# Altium PCB ST_LINK_V2_1.PcbDoc
Units mm, origin at the board's own origin, x right, y up, seen from the top; angles counter-clockwise.
Board outline 33 x 17 mm, 2 copper layers (Top Layer, Bottom Layer); 42 components, 29 nets, 138 pads, 20 vias.
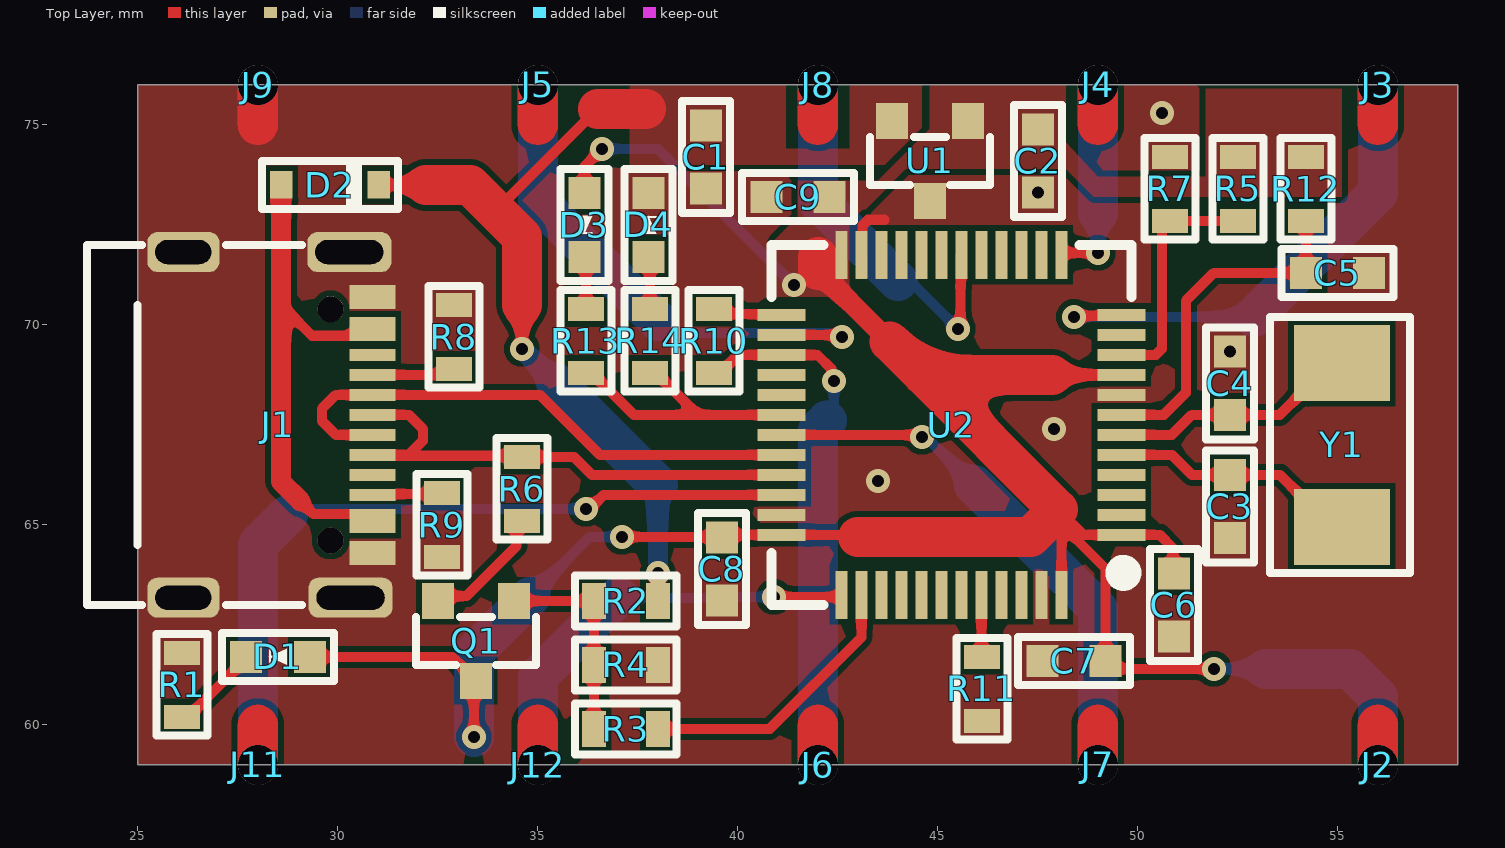
[diagram p0: Top Layer view]
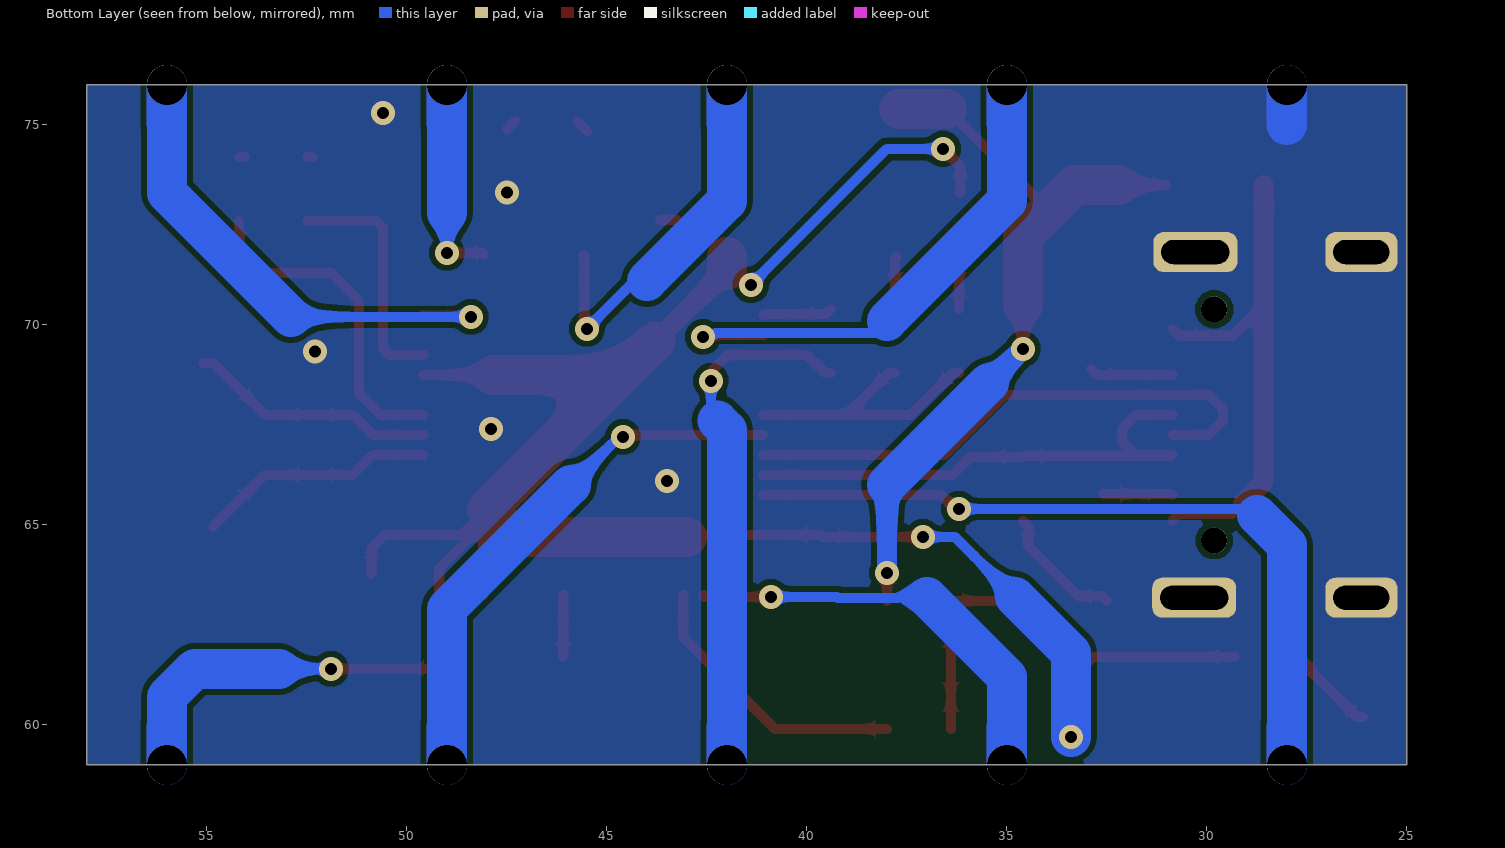
[diagram p1: Bottom Layer view, seen from below]

## Layer stack, top to bottom
Top Solder: solder mask 0.0102, Solder Resist, Dk 3.5
Top Layer: signal copper 0.0356
Dielectric 1: dielectric 0.32, FR-4, Dk 4.8
Bottom Layer: signal copper 0.0356
Bottom Solder: solder mask 0.0102, Solder Resist, Dk 3.5

## Board outline
25,59 58,59 58,76 25,76

## Design rules (kind name [scope] priority, off if disabled: settings)
Clearance [All] p1: gap=0.15 ignorepadtopadclearanceinfootprint=TRUE
PolygonConnect [All] p1: connectstyle=Direct reliefconductorwidth=0.254 reliefentries=4 polygonreliefangle="90 Angle" airgapwidth=0.254
RoutingVias [All] p1: holewidth=0.3 width=0.6 viastyle="Through Hole" minholewidth=0.2 minwidth=0.3 maxholewidth=0.3 maxwidth=0.6
SolderMaskExpansion [All] p1: expansion=0.102 istentingtop=FALSE
Width [All] p1: maxlimit=2 minlimit=0.254 preferedwidth=0.254
30 further rules are at their usual default settings.

## Components (designator, comment, footprint, x,y, rotation, side; value= is the part's Value field where it differs from the comment)
C1 "10uF" C_0603 39.2,74.2 r90 top
C2 "10uF" C_0603 47.5,74.1 r90 top
C3 "20pF" C_0603 52.3,65.46 r90 top
C4 "20pF" C_0603 52.3,68.54 r270 top
C5 "100nF" C_0603 54.99,71.3 r180 top
C6 "100nF" C_0603 50.9,63 r90 top
C7 "100nF" C_0603 48.4,61.6 r0 top
C8 "100nF" C_0603 39.6,63.9 r90 top
C9 "100nF" C_0603 41.5,73.2 r0 top
D1 "GREEN" LED_0603_G 28.5,61.7 r0 top
D2 "B5819WS-TP" SOD_323 29.8,73.5 r180 top
D3 "BLUE" LED_0603_B 36.165,72.5 r90 top
D4 "RED" LED_0603_R 37.765,72.5 r270 top
J1 "USB4105-GF-A" USB4105-GF-A 28.5,67.5 r270 top locked
J2 "CONST_PAD" CONST_PAD 56,59 r0 top
J3 "CONST_PAD" CONST_PAD 56,76 r180 top
J4 "CONST_PAD" CONST_PAD 49,76 r180 top
J5 "CONST_PAD" CONST_PAD 35,76 r180 top
J6 "CONST_PAD" CONST_PAD 42,59 r0 top
J7 "CONST_PAD" CONST_PAD 49,59 r0 top
J8 "CONST_PAD" CONST_PAD 42,76 r180 top
J9 "CONST_PAD" CONST_PAD 28,76 r180 top
J11 "CONST_PAD" CONST_PAD 28,59 r0 top
J12 "CONST_PAD" CONST_PAD 35,59 r0 top
Q1 "MMS9013L-TP" SOT_23 33.45,62.1 r180 top
R1 "220R" R_0603 26.1,61 r270 top
R2 "10k" R_0603 37.2,63.1 r0 top
R3 "100R" R_0603 37.2,59.9 r0 top
R4 "33k" R_0603 37.2,61.5 r180 top
R5 "4.7k" R_0603 52.5,73.4 r90 top
R6 "1.5k" R_0603 34.6,65.9 r270 top
R7 "4.7k" R_0603 50.8,73.4 r270 top
R8 "51k" R_0603 32.9,69.7 r90 top
R9 "51k" R_0603 32.6,65 r270 top
R10 "100R" R_0603 39.4,69.6 r270 top
R11 "100k" R_0603 46.1,60.9 r270 top
R12 "100k" R_0603 54.2,73.4 r270 top
R13 "220R" R_0603 36.2,69.6 r90 top
R14 "220R" R_0603 37.8,69.6 r270 top
U1 "ZMR330FTA" SOT_23_REG 44.8,74.1 r180 top
U2 "STM32F103C8T6" LQFP48 45.339,67.5 r180 top locked
Y1 "ECS-80-8-30Q-DS-TR" ECS-80-8-30Q-DS-TR 55.1,67 r270 top

## Footprints (in the part's own frame and the unit in brackets; to place one, negate y for a bottom-side part, rotate by r counter-clockwise, add the part's x,y. Pads: shape width x height; smd on the part's side, far side on the other; paste and mask are expansions set on the pad)
C_0603 [mm]
  rect 0.8x0.8 smd: 1(-0.79,0) 2(0.79,0)
  silkscreen extent -1.4,-0.6 1.4,0.6, body extent -0.8,-0.4 0.8,0.4, height 0.55
CONST_PAD [mm]
  round 1 hole 1: 0(0,0)
  Multi-Layer region: -0.5,0 0.5,0 0.5,1 0.45,1.217 0.312,1.391 0.111,1.487 -0.111,1.487 -0.312,1.391 -0.45,1.217 -0.5,1 -0.5,1
ECS-80-8-30Q-DS-TR [mm]
  rect 1.9x2.4 smd: 1(-2.05,0) 2(2.05,0)
  silkscreen extent -3.2,-1.8 3.2,1.7, body extent -3,-1.75 3,1.75, height 1.1
LED_0603_B [mm]
  rect 0.8x0.8 smd: 1(-0.8,0) 2(0.8,0)
  silkscreen extent -1.4,-0.6 1.4,0.6, body extent -0.8,-0.4 0.8,0.4, height 0.6
LED_0603_G [mm]
  rect 0.8x0.8 smd: 1(-0.8,0) 2(0.8,0)
  silkscreen extent -1.4,-0.6 1.4,0.6, body extent -0.8,-0.4 0.8,0.4, height 0.6
LED_0603_R [mm]
  rect 0.8x0.8 smd: 1(-0.8,0) 2(0.8,0)
  silkscreen extent -1.4,-0.6 1.4,0.6, body extent -0.8,-0.4 0.8,0.4, height 0.6
LQFP48 [mm]
  rect 1.2x0.3 smd mask+0.06: 1(-4.25,2.75) 2(-4.25,2.25) 3(-4.25,1.75) 4(-4.25,1.25) 5(-4.25,0.75) 6(-4.25,0.25) 7(-4.25,-0.25) 8(-4.25,-0.75) 9(-4.25,-1.25) 10(-4.25,-1.75) 11(-4.25,-2.25) 12(-4.25,-2.75) 25(4.25,-2.75) 26(4.25,-2.25) 27(4.25,-1.75) 28(4.25,-1.25) 29(4.25,-0.75) 30(4.25,-0.25) 31(4.25,0.25) 32(4.25,0.75) 33(4.25,1.25) 34(4.25,1.75) 35(4.25,2.25) 36(4.25,2.75)
  rect 0.3x1.2 smd mask+0.06: 13(-2.75,-4.25) 14(-2.25,-4.25) 15(-1.75,-4.25) 16(-1.25,-4.25) 17(-0.75,-4.25) 18(-0.25,-4.25) 19(0.25,-4.25) 20(0.75,-4.25) 21(1.25,-4.25) 22(1.75,-4.25) 23(2.25,-4.25) 24(2.75,-4.25) 37(2.75,4.25) 38(2.25,4.25) 39(1.75,4.25) 40(1.25,4.25) 41(0.75,4.25) 42(0.25,4.25) 43(-0.25,4.25) 44(-0.75,4.25) 45(-1.25,4.25) 46(-1.75,4.25) 47(-2.25,4.25) 48(-2.75,4.25)
  silkscreen extent -4.5,-4.5 4.5,4.5, body extent -4.5,-4.5 4.5,4.5, height 1.6
R_0603 [mm]
  rect 0.6x0.9 smd: 1(-0.8,0) 2(0.8,0)
  silkscreen extent -1.27,-0.64 1.27,0.64, body extent -0.8,-0.4 0.8,0.4, height 0.5
SOD_323 [mm]
  rect 0.56x0.69 smd mask+0.06: 1(-1.22,0) 2(1.22,0)
  silkscreen extent -1.7,-0.6 1.7,0.6, body extent -1.3,-0.67 1.3,0.67, height 1.1
SOT_23 [mm]
  rect 0.8x0.9 smd mask+0.06: 1(-0.95,-1) 2(0.95,-1) 3(0,1)
  silkscreen extent -1.5,-0.6 1.5,0.6, body extent -1.5,-1.32 1.5,1.32, height 1.08
SOT_23_REG [mm]
  rect 0.8x0.9 smd mask+0.06: 1(0,1) 2(-0.95,-1) 3(0.95,-1)
  silkscreen extent -1.5,-0.6 1.5,0.6, body extent -1.5,-1.32 1.5,1.32, height 1.08
USB4105-GF-A [mm]
  rect 0.3x1.15 smd mask+0.06: CC1(-1.25,2.363) CC2(1.75,2.362) DN1(0.25,2.363) DN2(-0.75,2.363) DP1(-0.25,2.363) DP2(0.75,2.363) SBU1(1.25,2.362) SBU2(-1.75,2.363)
  rect 0.6x1.15 smd mask+0.06: GND(-3.2,2.363) GND(3.2,2.363) VBUS(-2.4,2.363) VBUS(2.4,2.363)
  round 0.65 hole 0.65 unplated: GND(-2.89,1.318) GND(2.89,1.318)
  rrect50% 1x2.1 hole 0.6 slot 1.7 at 90 deg: SHELL_GND(-4.32,1.787) SHELL_GND(4.32,1.817)
  rrect50% 1x1.8 hole 0.6 slot 1.4 at 90 deg: SHELL_GND(-4.32,-2.362) SHELL_GND(4.32,-2.362)
  silkscreen extent -4.5,-4.78 4.5,0.6, body extent -4.47,-4.9 4.47,3, height 3.2

## Part data
C1 C2: library part C1608X5R0J106K080AB, "C Series 0603 10 uF 6.3 V ±10 % Tolerance X5R SMT Multilayer Ceramic Capacitor", Case Code (Imperial)=0603, Case Code (Metric)=1608, Dielectric=X5R, Dielectric Material=Ceramic, Manufacturer=TDK, Max Operating Temperature=85°C, Min Operating Temperature=-55°C, Package Quantity=1, Supplier Part Number 1=7882887P, Tolerance=10%, Voltage=6.3V, Capacitance=10uF, Case/Package=0603, Category="Ceramic Capacitors", ComponentLink1Description=https://datasheet.ciiva.com/23802/1796654-23802758.pdf?src-supplier=Newark, ComponentLink1URL=https://datasheet.ciiva.com/23802/1796654-23802758.pdf?src-supplier=Newark, ComponentLink2Description=https://datasheet.ciiva.com/6288/tdkmlcccaprange-6288538.pdf?src-supplier=Digi-Key, ComponentLink2URL=https://datasheet.ciiva.com/6288/tdkmlcccaprange-6288538.pdf?src-supplier=Digi-Key, ComponentLink3Description=https://datasheet.ciiva.com/28451/1796654-28451132.pdf?src-supplier=Element14, ComponentLink3URL=https://datasheet.ciiva.com/28451/1796654-28451132.pdf?src-supplier=Element14, ComponentLink4Description=https://datasheet.ciiva.com/6288/tdkmlcccaprange-6288541.pdf?src-supplier=Digi-Key, ComponentLink4URL=https://datasheet.ciiva.com/6288/tdkmlcccaprange-6288541.pdf?src-supplier=Digi-Key, ComponentLink5Description=https://datasheet.ciiva.com/16448/general-b11-16448959.pdf?src-supplier=Future+Electronics, ComponentLink5URL=https://datasheet.ciiva.com/16448/general-b11-16448959.pdf?src-supplier=Future+Electronics, ComponentLink6Description=https://datasheet.ciiva.com/22719/1796654-22719535.pdf?src-supplier=Element14, ComponentLink6URL=https://datasheet.ciiva.com/22719/1796654-22719535.pdf?src-supplier=Element14, Construction=Flat, Depth=0.8mm, Height=0.8mm, Lead Free="Lead Free", Length=1.6mm, Manufacturer Part Number=C1608X5R0J106K080AB, Mount="Surface Mount", Packaging="Tape and Reel", Pricing 1="50=0.01610, 100=0.14500, 250=0.12600, 500=0.10600 (GBP)", Radiation Hardening=No, Reach SVHC Compliant=Yes, Resistor Type=Ceramic, RoHS=Yes, RoHS Compliant=Yes, Series=C, Stock 1=5030, Supplier 1=Rs, Termination=SMD/SMT, Thickness=0.035inch, Voltage Rating=6.3V, Voltage Rating (DC)=6.3V, Weight=7.1E-05oz, Width=0.031inch
C3 C4: library part C0603C200K4HACAUTO, "Cap Cer 0603 20PF 16V Ultra Stab", Manufacturer=KEMET, Supplier Part Number 1=80-C0603C200K4HAUTO, Category="Ceramic Capacitors", Manufacturer Part Number=C0603C200K4HACAUTO, Pricing 1="1=0.18000, 10=0.08500, 50=0.08500, 100=0.04000, 1000=0.02400, 10000=0.02000 (USD)", RoHS=Yes, RoHS Compliant=Yes, Stock 1=12700, Supplier 1=Mouser
C5 C6 C7 C8 C9: library part C0603C104M4RAC7411, "Cap Ceramic 0.1uF 16V X7R 20% SMD 0603 125 Paper T/R", Case Code (Imperial)=0603, Case Code (Metric)=1608, Dielectric=X7R, Dielectric Material=Ceramic, Manufacturer=KEMET, Max Operating Temperature=125°C, Min Operating Temperature=-55°C, Package Quantity=10000, Supplier Part Number 1=80-C0603C104M4R7411, Tolerance=20%, Voltage Rating=16V, Capacitance=100nF, Case/Package=0603, Category="Ceramic Capacitors", ComponentLink1Description=http://components.arrow.com/part/dataview/3446650S8993799N7429?src-supplier=Arrow+Electronics, ComponentLink1URL=http://components.arrow.com/part/dataview/3446650S8993799N7429?src-supplier=Arrow+Electronics, ComponentLink2Description=http://www.mouser.com/ds/2/212/KEM_C1002_X7R_SMD-1102033.pdf?src-supplier=Mouser, ComponentLink2URL=http://www.mouser.com/ds/2/212/KEM_C1002_X7R_SMD-1102033.pdf?src-supplier=Mouser, ComponentLink3Description=http://www.farnell.com/datasheets/2747785.pdf?src-supplier=Farnell, ComponentLink3URL=http://www.farnell.com/datasheets/2747785.pdf?src-supplier=Farnell, ComponentLink4Description=http://www.jameco.com/Jameco/Products/ProdDS/1565046.pdf?src-supplier=Jameco, ComponentLink4URL=http://www.jameco.com/Jameco/Products/ProdDS/1565046.pdf?src-supplier=Jameco, ComponentLink5Description=http://www.farnell.com/datasheets/2747785.pdf?src-supplier=Element14, ComponentLink5URL=http://www.farnell.com/datasheets/2747785.pdf?src-supplier=Element14, ComponentLink6Description=http://www.farnell.com/datasheets/2747785.pdf?src-supplier=Newark, ComponentLink6URL=http://www.farnell.com/datasheets/2747785.pdf?src-supplier=Newark, ComponentLink7Description=https://api.kemet.com/component-edge/download/datasheet/C0603C104M4RAC7411.pdf?src-supplier=Digi-Key, ComponentLink7URL=https://api.kemet.com/component-edge/download/datasheet/C0603C104M4RAC7411.pdf?src-supplier=Digi-Key, ComponentLink8Description=http://www.kemet.com/docfinder?Partnumber=C0603C104M4RAC7411&src-supplier=Digi-Key, ComponentLink8URL=http://www.kemet.com/docfinder?Partnumber=C0603C104M4RAC7411&src-supplier=Digi-Key, ComponentLink9Description=http://capacitoredge.kemet.com/capedge2/DataSheet?pn=C0603C104M4RAC7411&src-supplier=Avnet, ComponentLink9URL=http://capacitoredge.kemet.com/capedge2/DataSheet?pn=C0603C104M4RAC7411&src-supplier=Avnet, ComponentLink10Description=https://www.verical.com/server-webapp/html/getDatasheet?partID=58458&src-supplier=Verical, ComponentLink10URL=https://www.verical.com/server-webapp/html/getDatasheet?partID=58458&src-supplier=Verical, Construction=Flat, Depth=0.8mm, Dissipation Factor=3.5%, Height=0.8mm, Lead Pitch=0.7mm, Length=1.6mm, Manufacturer Part Number=C0603C104M4RAC7411, Mount="Surface Mount", Packaging="Tape and Reel", Pricing 1="1=0.10000, 10=0.02700, 50=0.02700, 100=0.01200, 1000=0.00700, 10000=0.00500 (USD)", Radiation Hardening=No, RoHS=Yes, RoHS Compliant=Yes, Series=C, Stock 1=1220822, Supplier 1=Mouser, Termination=SMD/SMT, Thickness=0.034inch, Voltage Rating (DC)=16V, Width=0.8mm
D1: library part 150060GS75000, "Led, Green, 520 Nm, 3.2 V, 30 Ma, 430 Mcd Rohs Compliant: Yes", Case Code (Imperial)=0603, Case Code (Metric)=1608, Color=Green, Forward Current=30mA, Forward Voltage=3.2V, Lens Color=Colorless, Manufacturer="Wurth Electronics", Max Operating Temperature=85°C, Min Operating Temperature=-40°C, Package Quantity=1, Supplier Part Number 1=8154209P, Test Current=20mA, Case/Package=0603, Category=LEDs, ComponentLink1Description=https://datasheet.ciiva.com/29562/150060gs75000-29562868.pdf?src-supplier=Digi-Key, ComponentLink1URL=https://datasheet.ciiva.com/29562/150060gs75000-29562868.pdf?src-supplier=Digi-Key, ComponentLink2Description=https://datasheet.ciiva.com/29279/759427-da-01-en-chipled-0603-w-kl-gruen-150060gs75000-29279201.pdf?src-supplier=Conrad, ComponentLink2URL=https://datasheet.ciiva.com/29279/759427-da-01-en-chipled-0603-w-kl-gruen-150060gs75000-29279201.pdf?src-supplier=Conrad, ComponentLink3Description=https://datasheet.ciiva.com/29562/150060gs75000-29562869.pdf?src-supplier=Digi-Key, ComponentLink3URL=https://datasheet.ciiva.com/29562/150060gs75000-29562869.pdf?src-supplier=Digi-Key, ComponentLink4Description=https://datasheet.ciiva.com/29562/150060gs75000-29562870.pdf?src-supplier=Digi-Key, ComponentLink4URL=https://datasheet.ciiva.com/29562/150060gs75000-29562870.pdf?src-supplier=Digi-Key, Dominant Wavelength=520nm, Height=0.8mm, Lead Free="Lead Free", Length=1.6mm, Lens Size=0.7mm, Lens Style=Clear,Flat,Rectangular, Lens Transparency=Clear, Luminous Intensity=430mcd, Manufacturer Part Number=150060GS75000, Mount="Surface Mount", Packaging="Cut Tape", Pricing 1="500=0.00083, 1000=0.07900, 2000=0.07500, 4000=0.07100 (GBP)", RoHS=Yes, RoHS Compliant=Yes, Series=WL-SMCW, Stock 1=20200, Supplier 1=Rs, Viewing Angle=140°, Wavelength=520nm, Width=0.8mm
D2: "DIODE SCHOTTKY 40V 1A SOD323", Average Rectified Current=1A, Forward Voltage=900mV, Manufacturer=MCC, Max Operating Temperature=125°C, Max Reverse Leakage Current=1mA, Max Reverse Voltage (DC)=40V, Max Surge Current=10A, Min Operating Temperature=-65°C, Package Quantity=1, Supplier Part Number 1=6054560, Category="Rectifier Diodes", ComponentLink1Description=https://datasheet.ciiva.com/4715/b5817ws-b5819wssod-323-48861-4715941.pdf?src-supplier=Mouser, ComponentLink1URL=https://datasheet.ciiva.com/4715/b5817ws-b5819wssod-323-48861-4715941.pdf?src-supplier=Mouser, ComponentLink2Description=https://datasheet.ciiva.com/15200/getdatasheetpartid-184930-15200423.pdf?src-supplier=Verical, ComponentLink2URL=https://datasheet.ciiva.com/15200/getdatasheetpartid-184930-15200423.pdf?src-supplier=Verical, ComponentLink3Description=https://datasheet.ciiva.com/912/b5817ws-b5819wssod-323-912736.pdf?src-supplier=Digi-Key, ComponentLink3URL=https://datasheet.ciiva.com/912/b5817ws-b5819wssod-323-912736.pdf?src-supplier=Digi-Key, ComponentLink4Description=https://datasheet.ciiva.com/912/b5817ws-b5819wssod-323-912737.pdf?src-supplier=Digi-Key, ComponentLink4URL=https://datasheet.ciiva.com/912/b5817ws-b5819wssod-323-912737.pdf?src-supplier=Digi-Key, ComponentLink5Description=https://datasheet.ciiva.com/912/b5817ws-b5819wssod-323-912735.pdf?src-supplier=Digi-Key, ComponentLink5URL=https://datasheet.ciiva.com/912/b5817ws-b5819wssod-323-912735.pdf?src-supplier=Digi-Key, Element Configuration=Single, Lead Free="Lead Free", Manufacturer Part Number=B5819WS-TP, Mount="Surface Mount", Number of Pins=2, Packaging="Tape and Reel", Peak Non-Repetitive Surge Current=10A, Pricing 1="3000=0.05800, 9000=0.05580, 15000=0.05480, 45000=0.05280, 75000=0.05100 (USD)", Radiation Hardening=No, RoHS=Yes, RoHS Compliant=Yes, Series=-, Stock 1=168000, Supplier 1="Future Electronics"
D3: library part 150060BS75003, "SMT Mono-color Chip Led Watercle", Manufacturer="Wurth Electronics", Supplier Part Number 1=2407008P, Category=LEDs, Manufacturer Part Number=150060BS75003, Pricing 1="50=0.00824, 100=0.18100, 500=0.16500, 2000=0.13200 (GBP)", RoHS=No, Stock 1=11175, Supplier 1=Rs
D4: library part 150060RS75000, "LED Low-Power Uni-Color Red 630nm 2V 2-Pin Chip 0603(1608Metric) T/R", Case Code (Imperial)=0603, Case Code (Metric)=1608, Color=Red, Forward Current=30mA, Forward Voltage=2V, Lens Color=Colorless, Manufacturer="Wurth Electronics", Max Operating Temperature=85°C, Min Operating Temperature=-40°C, Package Quantity=1, Supplier Part Number 1=8154203P, Test Current=20mA, Case/Package=0603, Category=LEDs, ComponentLink1Description=https://datasheet.ciiva.com/29563/150060rs75000-29563040.pdf?src-supplier=Digi-Key, ComponentLink1URL=https://datasheet.ciiva.com/29563/150060rs75000-29563040.pdf?src-supplier=Digi-Key, ComponentLink2Description=https://datasheet.ciiva.com/29279/759428-da-01-en-chipled-0603-w-kl-rot-150060rs75000-29279196.pdf?src-supplier=Conrad, ComponentLink2URL=https://datasheet.ciiva.com/29279/759428-da-01-en-chipled-0603-w-kl-rot-150060rs75000-29279196.pdf?src-supplier=Conrad, Dominant Wavelength=625nm, Height=0.8mm, Length=1.6mm, Lens Size=0.7mm, Lens Style=Clear,Flat,Rectangular, Lens Transparency=Clear, Luminous Intensity=250mcd, Manufacturer Part Number=150060RS75000, Mount="Surface Mount", Packaging="Cut Tape", Pricing 1="500=0.00083, 1000=0.07900, 2000=0.07500, 4000=0.07200 (GBP)", RoHS=Yes, RoHS Compliant=Yes, Series=WL-SMCW, Stock 1=8900, Supplier 1=Rs, Viewing Angle=140°, Wavelength=625nm, Width=0.8mm
J1: "Conn USB 2.0 Type C RCP 24 POS 0.3mm/0.5mm Solder RA SMD 24 Terminal 1 Port T/R", Flammability Rating="UL94 V-0", Insulation Color=Black, Manufacturer="Global Connector Technology", Max Operating Temperature=85°C, Min Operating Temperature=-40°C, Supplier Part Number 1=3158113, Category="USB Connectors", ComponentLink1Description=https://gct.co/files/drawings/usb4105.pdf?src-supplier=Digi-Key, ComponentLink1URL=https://gct.co/files/drawings/usb4105.pdf?src-supplier=Digi-Key, Connector Type=USB, Contact Plating=Gold, Gender=Receptacle, Manufacturer Part Number=USB4105-GF-A, Mating Cycles=10000, Mount="Surface Mount,Through Hole,Horizontal", Number of Ports=1, Pricing 1="800=0.45000, 1600=0.44000, 2400=0.43500, 3200=0.43000, 4000=0.42000 (USD)", RoHS=No, Series=USB4105, Shielding=Shielded, Stock 1=800, Supplier 1="Future Electronics", Termination=Solder
Q1: "Trans Gp Bjt NPN 25V 0.5A 3-PIN SOT-23 T/r", Case/Package=SOT-23, Collector Base Voltage (VCBO)=40V, Collector Emitter Voltage (VCEO)=25V, Emitter Base Voltage (VEBO)=5V, Frequency=150MHz, Manufacturer=MCC, Max Operating Temperature=150°C, Min Operating Temperature=-55°C, Power Dissipation=300mW, Supplier Part Number 1=833-MMS9013L-TP, Category=BJTs, ComponentLink1Description=http://components.arrow.com/part/dataview/51062823S110403N2022?src-supplier=Arrow+Electronics, ComponentLink1URL=http://components.arrow.com/part/dataview/51062823S110403N2022?src-supplier=Arrow+Electronics, Manufacturer Part Number=MMS9013L-TP, Mount="Surface Mount", Number of Elements=1, Number of Pins=3, Packaging="Tape and Reel", Polarity=NPN, Pricing 1="1=0.28000, 10=0.22800, 50=0.22800, 100=0.12100, 1000=0.05500, 10000=0.03600 (USD)", RoHS=Yes, Stock 1=2960, Supplier 1=Mouser
R1 R13 R14: library part RC0603FR-07220RL, "Res Thick Film 0603 220 Ohm 1% 0.1W(1/10W) ±100ppm/°C Pad SMD T/R", Case Code (Imperial)=0603, Case Code (Metric)=1608, Manufacturer=Yageo, Max Operating Temperature=155°C, Max Power Dissipation=100mW, Min Operating Temperature=-55°C, Package Quantity=1, Resistance Tolerance=1%, Resistor Type="Thick Film", Supplier Part Number 1=9705021, Temperature Coefficient=100ppm/°C, Voltage Rating=50V, Case/Package=0603, Category="Chip SMD Resistors", ComponentLink1Description=https://datasheet.ciiva.com/2453/pyu-r-int-thick-7-2453974.pdf?src-supplier=Digi-Key, ComponentLink1URL=https://datasheet.ciiva.com/2453/pyu-r-int-thick-7-2453974.pdf?src-supplier=Digi-Key, ComponentLink2Description=https://datasheet.ciiva.com/2453/pyu-r-int-thick-7-2453975.pdf?src-supplier=Digi-Key, ComponentLink2URL=https://datasheet.ciiva.com/2453/pyu-r-int-thick-7-2453975.pdf?src-supplier=Digi-Key, ComponentLink3Description=https://datasheet.ciiva.com/2453/pyu-r-int-thick-7-2453973.pdf?src-supplier=Digi-Key, ComponentLink3URL=https://datasheet.ciiva.com/2453/pyu-r-int-thick-7-2453973.pdf?src-supplier=Digi-Key, ComponentLink4Description=https://datasheet.ciiva.com/7746/1738695-7746301.pdf?src-supplier=Element14, ComponentLink4URL=https://datasheet.ciiva.com/7746/1738695-7746301.pdf?src-supplier=Element14, ComponentLink5Description=https://datasheet.ciiva.com/7746/1738695-7746300.pdf?src-supplier=Element14, ComponentLink5URL=https://datasheet.ciiva.com/7746/1738695-7746300.pdf?src-supplier=Element14, Construction=Rectangular, Depth=0.8mm, Features="Moisture Resistant", Height=0.022inch, Lead Free="Lead Free", Length=0.063inch, Manufacturer Part Number=RC0603FR-07220RL, Military Standard=Not, Number of Pins=2, Number of Terminations=2, Packaging="Tape and Reel", Power Rating=100mW, Pricing 1="5000=0.00140, 50000=0.00130, 200000=0.00130, 625000=0.00120, 2000000=0.00110 (USD)", Reach SVHC Compliant=Yes, Resistance=220R, RoHS=Yes, RoHS Compliant=Yes, Series=RC, Size Code=0603, Stock 1=2420000, Supplier 1="Future Electronics", Termination=SMD/SMT, Tolerance=1%, Voltage Rating (DC)=50V, Width=0.031inch
R2: library part RC0603FR-0710KL, "RES SMD 10K OHM 1% 1/10W 0603", Case Code (Imperial)=0603, Case Code (Metric)=1608, Manufacturer=Yageo, Max Operating Temperature=155°C, Max Power Dissipation=100mW, Min Operating Temperature=-55°C, Resistance=10kR, Resistance Tolerance=1%, Resistor Type="Thick Film", Supplier Part Number 1=3349388, Temperature Coefficient=100ppm/°C, Voltage Rating=75V, Voltage Rating (DC)=50V, Case/Package=0603, Category="Chip SMD Resistors", ComponentLink1Description=https://datasheet.ciiva.com/7660/38590-7660789.pdf?src-supplier=Element14, ComponentLink1URL=https://datasheet.ciiva.com/7660/38590-7660789.pdf?src-supplier=Element14, ComponentLink2Description=https://datasheet.ciiva.com/7983/443971-7983596.pdf?src-supplier=Element14, ComponentLink2URL=https://datasheet.ciiva.com/7983/443971-7983596.pdf?src-supplier=Element14, ComponentLink3Description=https://datasheet.ciiva.com/22747/443971-22747519.pdf?src-supplier=Element14, ComponentLink3URL=https://datasheet.ciiva.com/22747/443971-22747519.pdf?src-supplier=Element14, ComponentLink4Description=https://datasheet.ciiva.com/46440/1868787-46440891.pdf?src-supplier=Element14, ComponentLink4URL=https://datasheet.ciiva.com/46440/1868787-46440891.pdf?src-supplier=Element14, ComponentLink5Description=https://datasheet.ciiva.com/7746/1738695-7746239.pdf?src-supplier=Element14, ComponentLink5URL=https://datasheet.ciiva.com/7746/1738695-7746239.pdf?src-supplier=Element14, Construction=Rectangular, Depth=0.8mm, Features="Moisture Resistant", Height=0.45mm, Lead Free="Lead Free", Lead Pitch=0.3mm, Length=1.6mm, Manufacturer Part Number=RC0603FR-0710KL, Military Standard=Not, Number of Pins=2, Number of Terminations=2, Packaging="Tape and Reel", Power Rating=100mW, Pricing 1="1=0.10000, 20=0.06640, 100=0.04840, 500=0.03040, 2500=0.01240 (USD)", Reach SVHC Compliant=Yes, RoHS=Yes, RoHS Compliant=Yes, Series=RC, Size Code=0603, Stock 1=252929, Supplier 1="Future Electronics", Termination=SMD/SMT, Tolerance=1%, Weight=7.1E-05oz, Width=0.8mm
R3 R10: library part AR0603FR-07100RL, "Res Thick Film 0603 100 Ohm 1% 1/10W ±100ppm/°C Molded SMD SMD Paper T/R", Case/Package=0603, Manufacturer=Yageo, Max Operating Temperature=155°C, Max Power Dissipation=100mW, Min Operating Temperature=-55°C, Resistor Type="Thick Film", Supplier Part Number 1=603-AR0603FR-07100RL, Temperature Coefficient=100ppm/°C, Tolerance=1%, Category="Chip SMD Resistors", ComponentLink1Description=https://datasheet.ciiva.com/8887/pyu-ar-51-rohs-l-7-8887862.pdf?src-supplier=Avnet, ComponentLink1URL=https://datasheet.ciiva.com/8887/pyu-ar-51-rohs-l-7-8887862.pdf?src-supplier=Avnet, Contact Plating=Gold, Features="Moisture Resistant", Height=0.022inch, Length=0.063inch, Manufacturer Part Number=AR0603FR-07100RL, Number of Terminations=2, Packaging="Tape and Reel", Pricing 1="1=0.44000, 10=0.33800, 50=0.33800, 100=0.14200, 1000=0.07900, 10000=0.06400 (USD)", Radiation Hardening=No, Resistance=100R, RoHS=Yes, RoHS Compliant=Yes, Series=AR, Stock 1=2721, Supplier 1=Mouser, Width=0.032inch
R4: library part RC0603FR-0733KL, "Res Thick Film 0603 33K Ohm 1% 0.1W(1/10W) ±100ppm/C Pad SMD T/R", Case Code (Imperial)=0603, Case Code (Metric)=1608, Manufacturer=Yageo, Max Operating Temperature=155°C, Max Power Dissipation=100mW, Min Operating Temperature=-55°C, Package Quantity=1, Resistance=33kR, Resistance Tolerance=1%, Resistor Type="Thick Film", Supplier Part Number 1=9831728, Temperature Coefficient=100ppm/°C, Voltage Rating=50V, Case/Package=0603, Category="Chip SMD Resistors", ComponentLink1Description=https://datasheet.ciiva.com/46395/443971-46395005.pdf?src-supplier=Element14, ComponentLink1URL=https://datasheet.ciiva.com/46395/443971-46395005.pdf?src-supplier=Element14, ComponentLink2Description=https://datasheet.ciiva.com/2454/pyu-r-int-thick-7-2454010.pdf?src-supplier=Digi-Key, ComponentLink2URL=https://datasheet.ciiva.com/2454/pyu-r-int-thick-7-2454010.pdf?src-supplier=Digi-Key, ComponentLink3Description=https://datasheet.ciiva.com/2454/pyu-r-int-thick-7-2454011.pdf?src-supplier=Digi-Key, ComponentLink3URL=https://datasheet.ciiva.com/2454/pyu-r-int-thick-7-2454011.pdf?src-supplier=Digi-Key, ComponentLink4Description=https://datasheet.ciiva.com/2454/pyu-r-int-thick-7-2454009.pdf?src-supplier=Digi-Key, ComponentLink4URL=https://datasheet.ciiva.com/2454/pyu-r-int-thick-7-2454009.pdf?src-supplier=Digi-Key, ComponentLink5Description=https://datasheet.ciiva.com/7746/443971-7746332.pdf?src-supplier=Element14, ComponentLink5URL=https://datasheet.ciiva.com/7746/443971-7746332.pdf?src-supplier=Element14, ComponentLink6Description=https://datasheet.ciiva.com/7746/443971-7746333.pdf?src-supplier=Element14, ComponentLink6URL=https://datasheet.ciiva.com/7746/443971-7746333.pdf?src-supplier=Element14, ComponentLink7Description=https://datasheet.ciiva.com/15189/getdatasheetpartid-353493-15189706.pdf?src-supplier=Verical, ComponentLink7URL=https://datasheet.ciiva.com/15189/getdatasheetpartid-353493-15189706.pdf?src-supplier=Verical, Construction=Rectangular, Depth=0.8mm, Features="Moisture Resistant", Height=0.022inch, Lead Free="Lead Free", Length=0.063inch, Manufacturer Part Number=RC0603FR-0733KL, Military Standard=Not, Number of Pins=2, Number of Terminations=2, Packaging="Tape and Reel", Power Rating=100mW, Pricing 1="5000=0.00140, 50000=0.00130, 200000=0.00130, 625000=0.00120, 2000000=0.00110 (USD)", Reach SVHC Compliant=Yes, RoHS=Yes, RoHS Compliant=Yes, Series=RC, Size Code=0603, Stock 1=3300000, Supplier 1="Future Electronics", Termination=SMD/SMT, Tolerance=1%, Voltage Rating (DC)=50V, Width=0.031inch
R5 R7: library part 1622960-1, "Res Thick Film 0603 4.7K Ohm 1% 0.1W(1/10W) ±100ppm/C Pad SMD T/R", Manufacturer="TE Connectivity", Supplier Part Number 1=46AK9345, Category=Uncategorized, ComponentLink1Description=https://datasheet.ciiva.com/6538/eng-cd-1622282-ba-6538072.pdf?src-supplier=Digi-Key, ComponentLink1URL=https://datasheet.ciiva.com/6538/eng-cd-1622282-ba-6538072.pdf?src-supplier=Digi-Key, ComponentLink2Description=https://datasheet.ciiva.com/8912/eng-ds-1773204-f-8912646.pdf?src-supplier=Avnet, ComponentLink2URL=https://datasheet.ciiva.com/8912/eng-ds-1773204-f-8912646.pdf?src-supplier=Avnet, Manufacturer Part Number=1622960-1, Pricing 1="1=0.004000, 25=0.004000, 100=0.004000, 250=0.004000, 500=0.004000, 1000=0.004000 (USD)", RoHS=Yes, Stock 1=19907, Supplier 1=Newark
R6: library part RC0603FR-071K5L, "Res General Purpose Thick Film 0603 1.5K Ohm 1% 1/10W ±100ppm/°C Molded SMD Paper T/R", Case Code (Imperial)=0603, Case Code (Metric)=1608, Manufacturer=Yageo, Max Operating Temperature=155°C, Max Power Dissipation=100mW, Min Operating Temperature=-55°C, Package Quantity=1, Resistance=1.5kR, Resistance Tolerance=1%, Resistor Type="Thick Film", Supplier Part Number 1=5194295, Temperature Coefficient=100ppm/°C, Voltage Rating=50V, Case/Package=0603, Category="Chip SMD Resistors", Construction=Rectangular, Depth=0.8mm, Features="Moisture Resistant", Height=0.022inch, Lead Free="Lead Free", Length=0.063inch, Manufacturer Part Number=RC0603FR-071K5L, Military Standard=Not, Number of Pins=2, Number of Terminations=2, Packaging="Tape and Reel", Power Rating=100mW, Pricing 1="5000=0.00150, 50000=0.00140, 100000=0.00140, 200000=0.00140, 375000=0.00140, 625000=0.00130, 1250000=0.00130, 2000000=0.00120, 5000000=0.00120 (USD)", Reach SVHC Compliant=Yes, RoHS=Yes, RoHS Compliant=Yes, Series=RC, Size Code=0603, Stock 1=16310000, Supplier 1="Future Electronics", Termination=SMD/SMT, Tolerance=1%, Voltage Rating (DC)=50V, Width=0.031inch
R8 R9: library part AF0603FR-0751KL, "Res Thick Film 0603 51K Ohm 1% 1/10W ±100ppm/°C Molded SMD Paper T/R", Case/Package=0603, Manufacturer=Yageo, Max Operating Temperature=155°C, Max Power Dissipation=100mW, Min Operating Temperature=-55°C, Resistance=51kR, Resistor Type="Thick Film", Supplier Part Number 1=603-AF0603FR-0751KL, Temperature Coefficient=100ppm/°C, Tolerance=1%, Category="Chip SMD Resistors", ComponentLink1Description=http://www.yageo.com/documents/recent/PYu-AF_51_RoHS_L_5.pdf?src-supplier=Digi-Key, ComponentLink1URL=http://www.yageo.com/documents/recent/PYu-AF_51_RoHS_L_5.pdf?src-supplier=Digi-Key, Features="Moisture Resistant,Anti-Sulfur", Height=0.022inch, Length=0.063inch, Manufacturer Part Number=AF0603FR-0751KL, Number of Terminations=2, Packaging="Tape and Reel", Pricing 1="1=0.19000, 10=0.06300, 50=0.06300, 100=0.02600, 1000=0.01200, 10000=0.00800 (USD)", RoHS=Yes, RoHS Compliant=Yes, Stock 1=893, Supplier 1=Mouser, Width=0.031inch
R11 R12: library part RC0603FR-07100KL, "RES SMD 100K OHM 1% 1/10W 0603", Case Code (Imperial)=0603, Case Code (Metric)=1608, Manufacturer=Yageo, Max Operating Temperature=155°C, Max Power Dissipation=100mW, Min Operating Temperature=-55°C, Resistance=100kR, Resistance Tolerance=1%, Resistor Type="Thick Film", Supplier Part Number 1=3697448, Temperature Coefficient=100ppm/°C, Voltage Rating=50V, Working Voltage=75V, Case/Package=0603, Category="Chip SMD Resistors", Construction=Rectangular, Depth=0.8mm, Features="Moisture Resistant", Height=0.45mm, Lead Free="Lead Free", Length=1.6mm, Manufacturer Part Number=RC0603FR-07100KL, Military Standard=Not, Number of Pins=2, Number of Terminations=2, Packaging="Tape and Reel", Power Rating=100mW, Pricing 1="5000=0.00140, 50000=0.00130, 200000=0.00130, 625000=0.00120, 2000000=0.00110 (USD)", Reach SVHC Compliant=Yes, RoHS=Yes, RoHS Compliant=Yes, Series=RC, Stock 1=32435000, Supplier 1="Future Electronics", Technology="THICK FILM", Termination=SMD/SMT, Tolerance=1%, Voltage Rating (DC)=50V, Width=0.8mm
U1: "ZMR330 Series 3.3 V 50 mA Fixed Output SMT Miniature Voltage Regulator - SOT-23", Case/Package=SOT-23, Manufacturer="Diodes Zetex", Max Input Voltage=24V, Max Operating Temperature=125°C, Max Output Current=50mA, Max Power Dissipation=500mW, Min Input Voltage=4.8V, Min Operating Temperature=-55°C, Min Output Voltage=3.3V, Package Quantity=3000, Power Supply Rejection Ratio (PSRR)=55dB, Supplier Part Number 1=7106313P, Category="Voltage Regulators - Linear", ComponentLink1Description=https://datasheet.ciiva.com/2040/zmrseries-2040368.pdf?src-supplier=Digi-Key, ComponentLink1URL=https://datasheet.ciiva.com/2040/zmrseries-2040368.pdf?src-supplier=Digi-Key, ComponentLink2Description=https://datasheet.ciiva.com/8240/zmrseries-8240837.pdf?src-supplier=Avnet, ComponentLink2URL=https://datasheet.ciiva.com/8240/zmrseries-8240837.pdf?src-supplier=Avnet, ComponentLink3Description=https://datasheet.ciiva.com/16509/zmrseries-16509194.pdf?src-supplier=Future+Electronics, ComponentLink3URL=https://datasheet.ciiva.com/16509/zmrseries-16509194.pdf?src-supplier=Future+Electronics, Height=1.02mm, Lead Free="Lead Free", Length=3.04mm, Manufacturer Part Number=ZMR330FTA, Mount="Surface Mount", Number of Outputs=1, Number of Pins=3, Number of Regulators=1, Output Current=50mA, Output Type=Fixed, Output Voltage=3.3V, Packaging="Tape and Reel", Polarity=Positive, Power Dissipation=500mW, Power Rating=500mW, Pricing 1="30=0.15480, 150=0.66200, 750=0.55400, 1500=0.43800 (GBP)", Radiation Hardening=No, Reach SVHC Compliant=Yes, RoHS=Yes, RoHS Compliant=Yes, Series=-, Stock 1=4550, Supplier 1=Rs, Weight=0.000282oz, Width=1.4mm
U2: "IC MCU 32BIT 64KB FLASH 48LQFP", Case/Package=LQFP, Frequency=72MHz, Manufacturer=STMicroelectronics, Max Operating Temperature=85°C, Max Power Dissipation=363mW, Max Supply Voltage=3.6V, Min Operating Temperature=-40°C, Min Supply Voltage=2V, Package Quantity=1500, Supplier Part Number 1=511-STM32F103C8T6, Address Bus Width=32b, Category=Microcontrollers, ComponentLink1Description=https://datasheet.ciiva.com/15122/getdatasheetpartid-69880-15122076.pdf?src-supplier=Verical, ComponentLink1URL=https://datasheet.ciiva.com/15122/getdatasheetpartid-69880-15122076.pdf?src-supplier=Verical, ComponentLink2Description=https://datasheet.ciiva.com/8054/1730126-8054942.pdf?src-supplier=Element14, ComponentLink2URL=https://datasheet.ciiva.com/8054/1730126-8054942.pdf?src-supplier=Element14, ComponentLink3Description=https://datasheet.ciiva.com/14100/pustm-arm-microcont-stm32f103-en-14100508.pdf?src-supplier=Distrelec, ComponentLink3URL=https://datasheet.ciiva.com/14100/pustm-arm-microcont-stm32f103-en-14100508.pdf?src-supplier=Distrelec, ComponentLink4Description=https://datasheet.ciiva.com/16210/cd00161566-16210248.pdf?src-supplier=Future+Electronics, ComponentLink4URL=https://datasheet.ciiva.com/16210/cd00161566-16210248.pdf?src-supplier=Future+Electronics, ComponentLink5Description=https://datasheet.ciiva.com/48687/001075658-da-01-en-mcu-64kb-mem-stm32f103c8t6-lqfp-48-stm-48687589.pdf?src-supplier=Conrad, ComponentLink5URL=https://datasheet.ciiva.com/48687/001075658-da-01-en-mcu-64kb-mem-stm32f103c8t6-lqfp-48-stm-48687589.pdf?src-supplier=Conrad, Core Architecture=ARM, Data Bus Width=32b, Density=64KB, Height=1.4mm, Interface=I2C,SPI,USB,CAN,USART, Lead Free="Lead Free", Length=7mm, Manufacturer Part Number=STM32F103C8T6, Max Frequency=72MHz, Memory Size=64KB, Memory Type=FLASH, Number of ADC Channels=10, Number of Bits=32, Number of I2C Channels=2, Number of I/Os=37, Number of Pins=48, Number of Programmable I/O=48, Number of PWM Channels=1, Number of SPI Channels=2, Number of Timers/Counters=3, Oscillator Type=Internal, Packaging=Tray, Peripherals="POR,PWM,WDT,DMA,Temp Sensor,I2C", Pricing 1="1=6.66000, 10=6.02000, 50=4.98000, 100=4.98000, 1000=3.75000, 10000=3.67000 (USD)", Radiation Hardening=No, RAM Size=20KB, Reach SVHC Compliant=Yes, RoHS=Yes, RoHS Compliant=Yes, Series=STM32F103C8, Stock 1=33571, Supplier 1=Mouser, Termination=SMD/SMT, Watchdog Timer=Yes, Weight=0.006349oz, Width=7mm
Y1: "Crystal 8.000 Mhz 8PF SMD", Manufacturer="ECS International", Supplier Part Number 1=520-80-8-30Q-DS-TR, Category=Uncategorized, Manufacturer Part Number=ECS-80-8-30Q-DS-TR, Pricing 1="1=0.84000, 10=0.73600, 50=0.73600, 100=0.60800, 1000=0.47900, 10000=0.43100 (USD)", RoHS=Yes, RoHS Compliant=Yes, Stock 1=2000, Supplier 1=Mouser

## Via types
v1: diameter 0.6, hole 0.3, Top Layer to Bottom Layer, 20 vias

## Nets (pads, with @x,y where several pads share a name; then routed paths per layer and width w, separated by ;. In a path a pad name is that pad's centre, name@x,y a point inside that pad or via, vN(x,y) a via of type N, cw(c..) or ccw(c..) an arc to the next point about the centre after c; other vN are vias at no path point)
+3V3: C2.2 C6.2 C7.2 C8.2 C9.2 D1.2 D3.2 J2.0 Q1.3 R5.2 R12.1 U1.2 U2.1 U2.9 U2.24 U2.36 U2.48 | length 65.4
  Top Layer w0.254: D1.2 32.85,61.7 33.127,61.423 33.177,61.423 33.45,61.15 Q1.3 33.4,61.05 v1(33.4,59.7) ; D3.2 36.165,73.965 v1(36.6,74.4) ; v1(37.1,64.7) 39.59,64.7 C8.2 39.66,64.75 U2.36 42.95,64.75 43,64.7 ; C9.2@42.017,72.927 C9.2 ; U1.2@45.485,74.835 U1.2 ; C2.2@47.29,75.1 C2.2 ; 47.85,68.75 U2.9 ; 48,65.381 48.089,65.292 ; U2.48 48.089,65.011 ; C6.2 50.878,63.812 50.878,64.422 50.55,64.75 U2.1 48.631,64.75 48.089,65.292 ; v1(51.9,61.4) 49.39,61.4 C7.2 49.19,63.91 48.089,65.011 ; R5.2@52.35,74.2 R5.2 ; R12.1@54.05,74.2 R12.1 ; 48.089,65.011 48.089,65.292
  Top Layer w0.5: 42,71.375 43.784,69.59 43.79,69.59
  Top Layer w1: 42,71.375 42,71.7 ; 43,64.7 47.319,64.7 48,65.381 44.631,68.75 ; 43.79,69.59 44.631,68.75 ; 47.85,68.75 44.631,68.75
  Bottom Layer w0.254: 34.8,63.2 36.3,64.7 v1(37.1,64.7) ; v1(36.6,74.4) 38,74.4 v1(41.4,71) ; v1(51.9,61.4) 53.2,61.4
  Bottom Layer w1: v1(33.4,59.7) 33.4,61.8 34.8,63.2 ; 53.2,61.4 55.3,61.4 56,60.7 J2.0
+5V: C1.2 D2.1 R2.2 U1.3 | length 19.4
  Top Layer w0.254: D2.1 32.2,73.5 ; 33.95,72.85 36.5,75.4 ; v1(34.6,69.4) 34.6,70.5 ; R2.2 v1(38,63.8)
  Top Layer w1: 32.2,73.5 33.3,73.5 33.95,72.85 34.6,72.2 34.6,70.5 ; 36.5,75.4 37.7,75.4
  Bottom Layer w0.5: v1(34.6,69.4) 35.45,68.55 ; v1(38,63.8) 38,66
  Bottom Layer w1: 35.45,68.55 38,66
+VBUS: D2.2 J1.VBUS | length 12.8
  Top Layer w0.254: 28.58,70.5 29.353,69.727 30.69,69.727 J1.VBUS@30.863,69.9 ; 29.07,65.59 29.387,65.273 30.266,65.273 30.69,65.273 J1.VBUS@30.863,65.1
  Top Layer w0.5: D2.2 28.58,70.5 28.58,66.08 29.07,65.59
CLK: J12.0 U2.37 | length 10.7
  Top Layer w0.254: v1(40.9,63.2) 42.566,63.2 42.589,63.223 U2.37
  Bottom Layer w0.254: 37,63.2 37.713,63.2 37.74,63.173 39.227,63.173 39.254,63.2 v1(40.9,63.2)
  Bottom Layer w1: J12.0 35,61.2 37,63.2
DATA_N: J1.DN1 J1.DN2 U2.32 | length 14
  Top Layer w0.254: J1.DN1 29.95,67.25 29.6,67.6 29.6,67.9 29.95,68.25 J1.DN2 35.05,68.25 36.55,66.75 U2.32
DATA_P: J1.DP1 J1.DP2 R6.1 U2.33 | length 13.5
  Top Layer w0.254: J1.DP1 31.775,67.75 32.125,67.4 32.125,67.1 31.775,66.75 J1.DP2 30.886,66.727 34.573,66.727 R6.1 35.9,66.7 36.35,66.25 U2.33
DIO: J11.0 U2.34 | length 19.2
  Top Layer w0.254: v1(36.2,65.4) 36.294,65.4 36.644,65.75 U2.34
  Bottom Layer w0.254: 28.75,65.25 28.9,65.4 v1(36.2,65.4) v1@36.266,65.334
  Bottom Layer w1: J11.0 28,64.5 28.75,65.25
GND: C1.1 C2.1 C3.1 C4.1 C5.1 C6.1 C7.1 C8.1 C9.1 D4.1 J1.GND@30.863,64.3 J1.GND@30.863,70.7 J1.SHELL_GND J9.0 R1.1 R4.1 R7.1 R8.2 R9.2 R11.2 U1.1 U2.8 U2.23 U2.35 U2.47 | length 1.4
  Top Layer w0.254: U2.23 43.112,71.773 43.112,72.478 43.261,72.627 43.665,72.627
  other v1: 43.5,66.1 47.9,67.4 52.3,69.33 47.5,73.31 50.6,75.3
LED: R13.1 R14.2 U2.30 | length 7
  Top Layer w0.254: R13.1 36.35,68.8 37.4,67.75 39,67.75 ; R14.2 37.95,68.8 39,67.75 ; U2.30 39,67.75
NetC3_2: C3.2 U2.5 Y1.2 | length 6
  Top Layer w0.254: U2.5 50.85,66.75 51.35,66.25 C3.2 53.55,66.25 Y1.2@54.85,64.95
NetC4_2: C4.2 U2.6 Y1.1 | length 6.3
  Top Layer w0.254: U2.6 50.85,67.25 51.35,67.75 C4.2 53.55,67.75 54.85,69.05 Y1.1
NetC5_2: C5.2 R12.2 U2.7 | length 8.7
  Top Layer w0.254: U2.7 50.65,67.75 51.2,68.3 51.2,70.6 51.9,71.3 C5.2 R12.2
NetD1_1: D1.1 R1.2 | length 2.3
  Top Layer w0.254: R1.2 26.25,60.2 27.427,61.377 27.427,61.427 D1.1
NetD3_1: D3.1 R13.2 | length 1.3
  Top Layer w0.254: D3.1 36.2,71.665 R13.2
NetD4_2: D4.2 R14.1 | length 1.3
  Top Layer w0.254: D4.2 37.8,71.665 R14.1
NetJ1_CC1: J1.CC1 R8.1 | length 2.1
  Top Layer w0.254: J1.CC1 32.75,68.75 R8.1
NetJ1_CC2: J1.CC2 R9.1 | length 1.8
  Top Layer w0.254: J1.CC2 30.885,65.773 32.573,65.773 R9.1
NetQ1_1: Q1.1 R2.1 R3.1 R4.2 | length 5.2
  Top Layer w0.254: Q1.1 R2.1 R3.1
NetQ1_2: Q1.2 R6.2 | length 3.2
  Top Layer w0.254: Q1.2 32.62,63.22 33.207,63.22 34.468,64.48 34.468,64.968 R6.2
NetR5_1: R5.1 R7.2 U2.10 | length 6.1
  Top Layer w0.254: U2.10 50.45,69.25 50.6,69.4 50.6,72.427 50.773,72.6 R5.1
NetR10_1: R10.1 U2.25 | length 1.8
  Top Layer w0.254: R10.1 39.527,70.273 41.066,70.273 U2.25
NetR11_1: R11.1 U2.44 | length 1.6
  Top Layer w0.254: U2.44 46.089,61.711 R11.1
RENUM: R3.2 U2.38 | length 7.1
  Top Layer w0.254: R3.2 40.8,59.9 43.089,62.189 U2.38
T_CLK: J5.0 U2.26 | length 13.4
  Top Layer w0.254: U2.26 42.55,69.75 v1(42.6,69.7)
  Bottom Layer w0.254: 38,70.1 38.3,69.8 42.278,69.8 42.312,69.766 42.534,69.766 v1(42.6,69.7)
  Bottom Layer w1: J5.0 35,73.1 38,70.1
T_DIO: J6.0 R10.2 U2.27 | length 13.4
  Top Layer w0.254: R10.2 39.55,68.8 40,69.25 U2.27 41.093,69.246 41.991,69.246 42.334,68.904 42.334,68.666 v1(42.4,68.6)
  Bottom Layer w0.254: 42.234,67.606 42.4,67.772 v1(42.4,68.6)
  Bottom Layer w1: J6.0 42,67.372 42.234,67.606
T_RST: J8.0 U2.18 | length 9.6
  Top Layer w0.254: v1(45.5,69.9) 45.566,69.966 45.566,71.727 U2.18
  Bottom Layer w0.254: 44,71.1 44.3,71.1 v1(45.5,69.9)
  Bottom Layer w1: J8.0 42,73.1 44,71.1
T_RX: J4.0 U2.13 | length 5.1
  Top Layer w0.254: U2.13 48.089,71.777 48.112,71.8 v1(49,71.8)
  Bottom Layer w0.254: v1(49,71.8) 49,72.8
  Bottom Layer w1: 49,72.8 J4.0
T_SWO: J7.0 U2.31 | length 13.6
  Top Layer w0.254: U2.31 44.55,67.25 v1(44.6,67.2)
  Bottom Layer w0.254: v1(44.6,67.2) 44.694,67.2 44.867,67.027 44.873,67.027 45.9,66
  Bottom Layer w1: 45.9,66 49,62.9 J7.0
T_TX: J3.0 U2.12 | length 12.8
  Top Layer w0.254: v1(48.4,70.2) 48.427,70.227 49.566,70.227 U2.12
  Bottom Layer w0.254: v1(48.4,70.2) 52.9,70.2
  Bottom Layer w1: 52.9,70.2 56,73.3 J3.0
pads on no net: J1.GND@29.817,64.61 J1.GND@29.817,70.39 J1.SBU1 J1.SBU2 U2.2 U2.3 U2.4 U2.11 U2.14 U2.15 U2.16 U2.17 U2.19 U2.20 U2.21 U2.22 U2.28 U2.29 U2.39 U2.40 U2.41 U2.42 U2.43 U2.45 U2.46

## Polygon pours and split planes (outlines as drawn)
GND on Top Layer "GND_L01_P005" (solid, remove dead copper, pour order 5): 25,76 58,76 58,59 25,59
+3V3 on Top Layer "+3V3_L01_P003" (solid, remove dead copper, pour order 3): 45,75.1 44.75,74.85 43.5,73.6 41.5,73.6 41.5,72.7 40.9,72.1 40.9,70.7 42.8,70.7 42.8,72.6 42.8,72.5 44.2,73.9 44.8,73.9
+5V on Top Layer "+5V_L01_P004" (solid, remove dead copper, pour order 4): 42.8,76 44.6,76 44.6,74.9 43.7,74 37.3,74 37.3,76 41.2,76 41.2,74.4 41.3,74.4 41.4,74.4 42.8,74.4
+3V3 on Top Layer "+3V3_L01_P002" (solid, remove dead copper, pour order 2): 52,73.2 48.9,73.2 48.8,73.3 47.7,74.4 47.8,75 49,73.7 52,73.7
+3V3 on Top Layer "+3V3_L01_P001" (solid, remove dead copper, pour order 1): 55.1,75.9 51.7,75.9 51.7,73.2 55.1,73.2
+3V3 on Top Layer "+3V3_L01_P000" (solid, remove dead copper, pour order 0): 48.2,76 44.8,76 44.8,73.9 48.2,73.9
GND on Bottom Layer "GND_L02_P006" (solid, remove dead copper, pour order 6): 25,76 58,76 58,59 25,59

## Silkscreen, mask and mechanical layers (free items; w line width, h text height)
Mechanical 1:
  the board outline again, w0.2